# Altium PCB bob_breakout.PcbDoc
Units mil, origin at the board's own origin, x right, y up, seen from the top; angles counter-clockwise.
Board outline 5510 x 3935 mil, 2 copper layers (Top Layer, Bottom Layer); 51 components, 72 nets, 297 pads, 0 vias.
Unrouted connection lines stored in the file: 202.
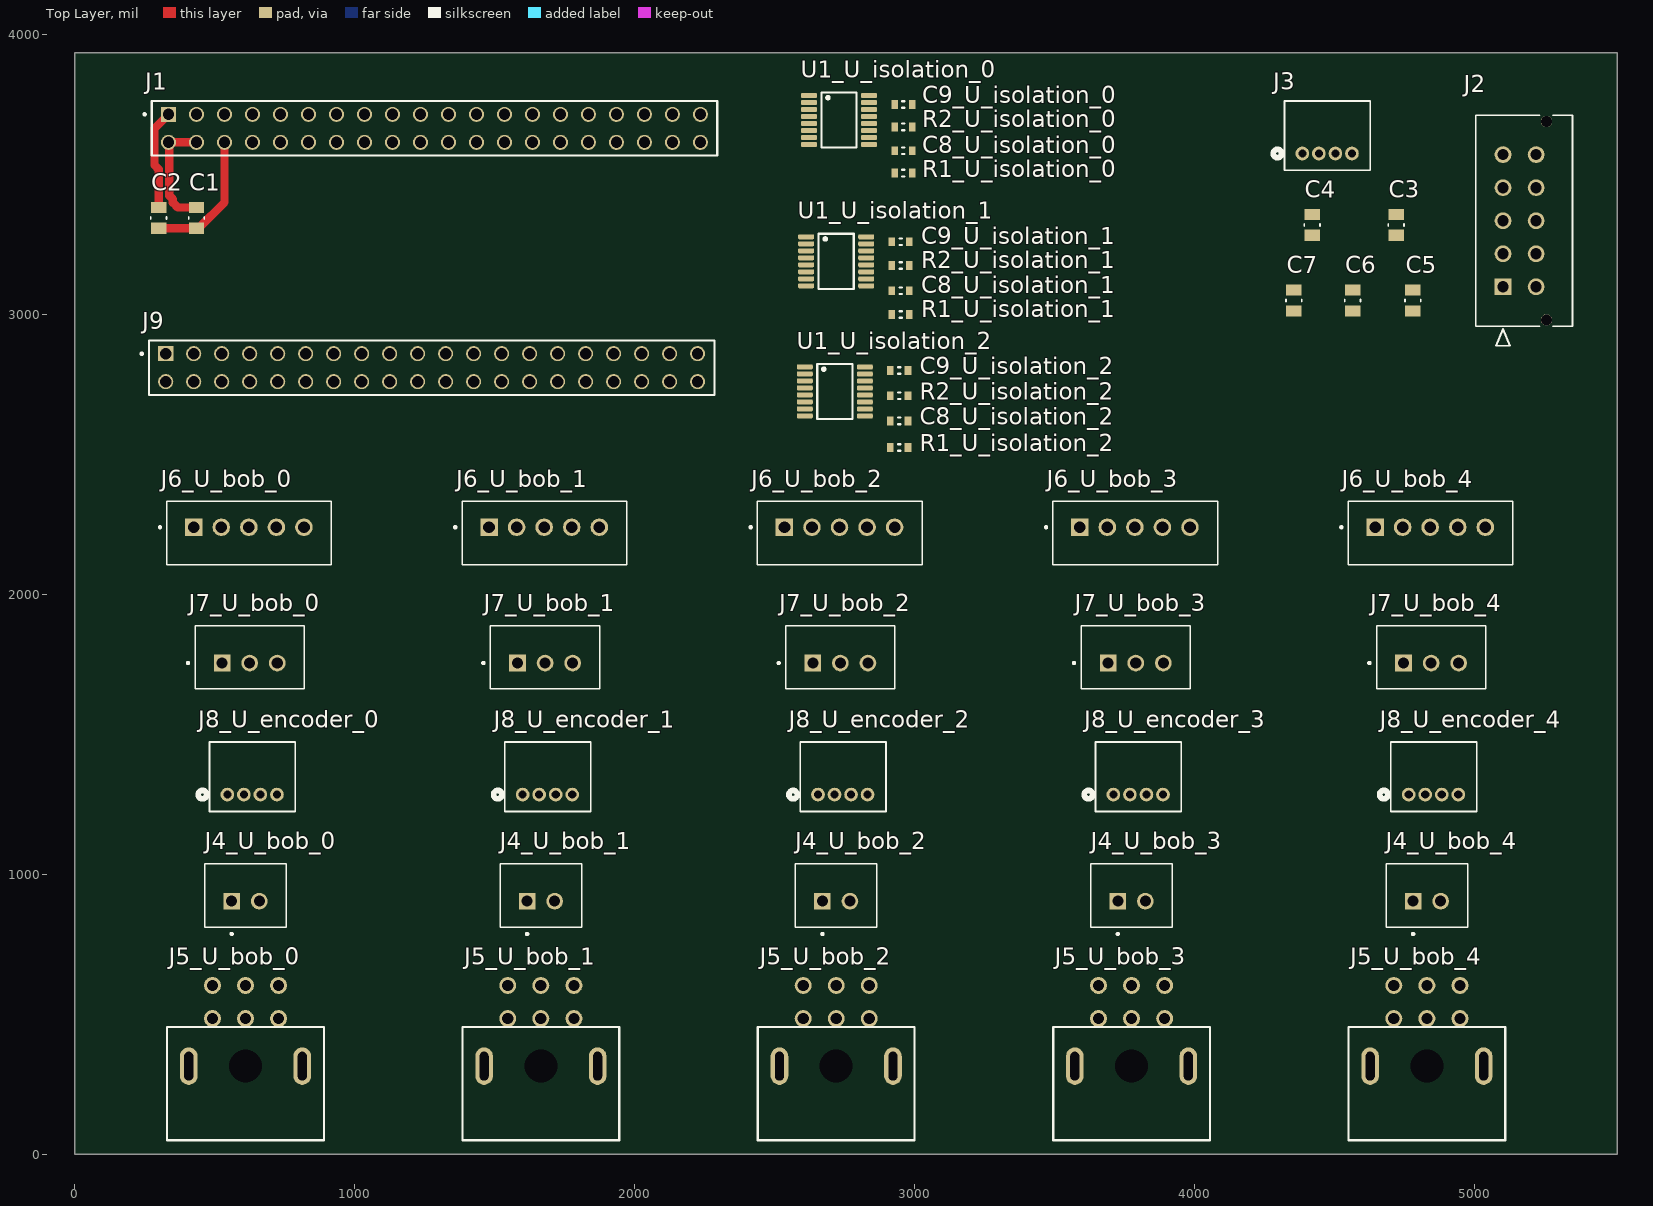
[diagram p0: Top Layer view]
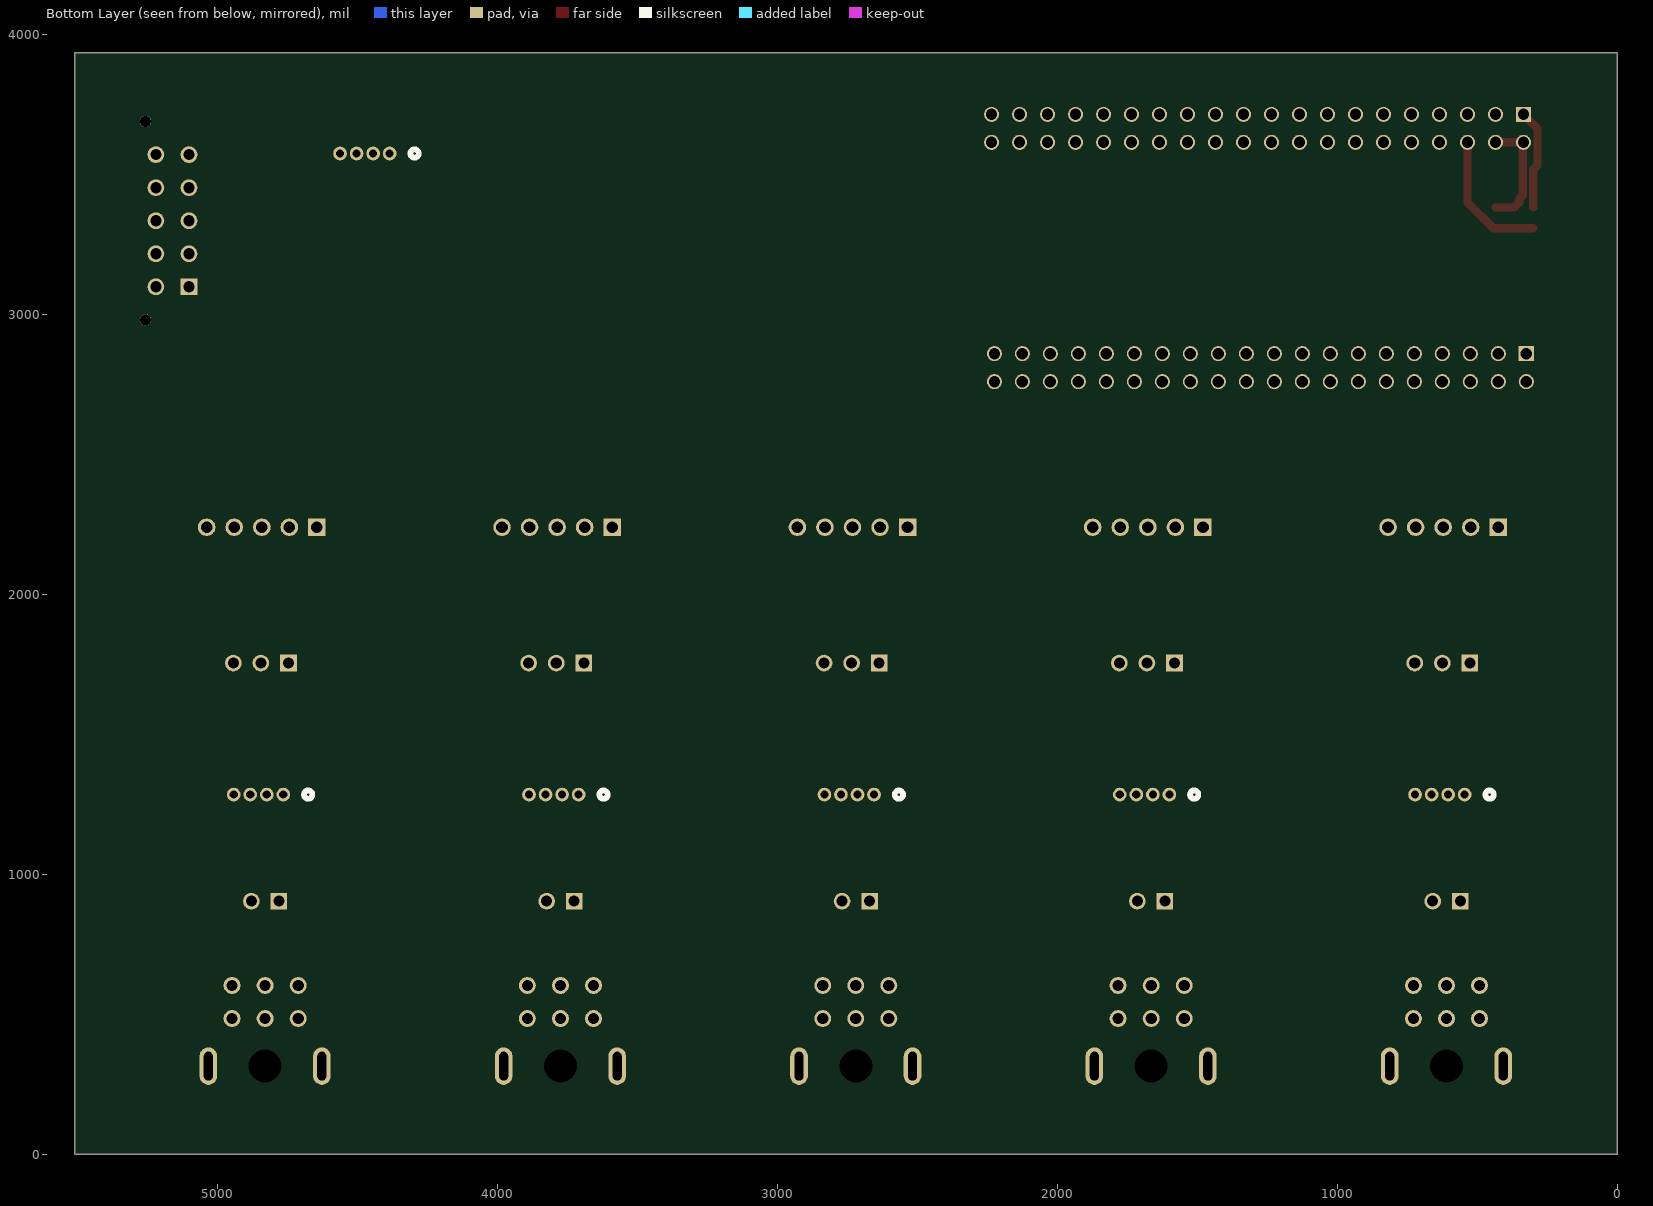
[diagram p1: Bottom Layer view, seen from below]

## Layer stack, top to bottom
Top Solder: solder mask 0.4, Solder Resist, Dk 3.5
Top Layer: signal copper 1.4
Dielectric 1: dielectric 12.6, FR-4, Dk 4.8
Bottom Layer: signal copper 1.4
Bottom Solder: solder mask 0.4, Solder Resist, Dk 3.5

## Board outline
0,0 5510,0 5510,3935 0,3935

## Design rules (kind name [scope] priority, off if disabled: settings)
BoardOutlineClearance [All] p1: gap=7.87 ignorepadtopadclearanceinfootprint=FALSE except(15.75: Arc-SplitBarrior Arc-SplitContinuation Track-SplitBarrior Track-SplitContinuation SMDPad-SplitBarrior SMDPad-SplitContinuation THPad-SplitBarrior THPad-SplitContinuation Via-SplitBarrior Via-SplitContinuation Fill-SplitBarrior Fill-SplitContinuation Poly-SplitBarrior Poly-SplitContinuation Region-SplitBarrior Region-SplitContinuation Text-SplitBarrior Text-SplitContinuation)
Clearance "Clearance Bottom Layer" [OnLayer('Bottom Layer')] p1: gap=8 ignorepadtopadclearanceinfootprint=TRUE except(10: Arc-Text Track-Text SMDPad-Text THPad-Text Via-Text Fill-Text Poly-Text Region-Text Text-Text)
Clearance "Clearance Top Layer" [OnLayer('Top Layer')] p2: gap=8 ignorepadtopadclearanceinfootprint=TRUE except(10: Arc-Text Track-Text SMDPad-Text THPad-Text Via-Text Fill-Text Poly-Text Region-Text Text-Text)
Clearance [All] p3: gap=7.87 ignorepadtopadclearanceinfootprint=TRUE except(3.5: Arc-Arc Arc-Track Arc-SMDPad Track-Track Track-SMDPad SMDPad-SMDPad; 5: Arc-Via Track-Via SMDPad-Via THPad-Via Via-Via; 10: Arc-Text Track-Text SMDPad-Text THPad-Text Via-Text Fill-Text Poly-Text Region-Text Text-Text)
HoleSize [All] p1: absolutevalues=TRUE maxlimit=248.03 minlimit=7.87 maxpercent=80.000 minpercent=20.000
MinimumAnnularRing [All] p1: minimumring=3
MinimumSolderMaskSliver [All] p1: minsoldermaskwidth=3.94
PolygonConnect PolygonConnect_1 [All] p1: thpad.connectstyle=Relief thpad.reliefconductorwidth=20 thpad.reliefentries=4 thpad.polygonreliefangle="90 Angle" thpad.airgapwidth=10 smdpad.connectstyle=Relief smdpad.reliefconductorwidth=20 smdpad.reliefentries=4 smdpad.polygonreliefangle="90 Angle" smdpad.airgapwidth=10 via.connectstyle=Direct via.reliefconductorwidth=20 via.reliefentries=4 via.polygonreliefangle="90 Angle" via.airgapwidth=10
RoomDefinition U_ui [InComponentClass('U_ui')] p1: confinementstyle=ConfineIn formatcopy=TRUE lockcomponents=FALSE outline 221.5,2691.73 221.5,2928.27 2305.87,2928.27 2305.87,2691.73
RoomDefinition U_power [InComponentClass('U_power')] p2: confinementstyle=ConfineIn formatcopy=TRUE lockcomponents=FALSE outline 4260,2875 5415,2875 5415,3785 4260,3785
RoomDefinition U_jetson-nano [InComponentClass('U_jetson-nano')] p3: confinementstyle=ConfineIn formatcopy=TRUE lockcomponents=FALSE outline 230,3210 2320,3210 2320,3785 230,3785
RoomDefinition U_isolation_2 [InComponentClass('U_isolation_2')] p4: confinementstyle=ConfineIn formatcopy=TRUE lockcomponents=FALSE outline 2555,2490 3005,2490 3005,2850 2555,2850
RoomDefinition U_isolation_1 [InComponentClass('U_isolation_1')] p5: confinementstyle=ConfineIn formatcopy=TRUE lockcomponents=FALSE outline 2560,2965 3010,2965 3010,3315 2560,3315
RoomDefinition U_isolation_0 [InComponentClass('U_isolation_0')] p6: confinementstyle=ConfineIn formatcopy=TRUE lockcomponents=FALSE outline 2570,3470 3020,3470 3020,3820 2570,3820
RoomDefinition U_encoder_4 [InComponentClass('U_encoder_4')] p7: confinementstyle=ConfineIn formatcopy=TRUE lockcomponents=FALSE outline 4641.06,1204.88 4641.06,1492.88 5028.06,1492.88 5028.06,1204.88
RoomDefinition U_encoder_3 [InComponentClass('U_encoder_3')] p8: confinementstyle=ConfineIn formatcopy=TRUE lockcomponents=FALSE outline 3586.06,1204.88 3586.06,1492.88 3973.06,1492.88 3973.06,1204.88
RoomDefinition U_encoder_2 [InComponentClass('U_encoder_2')] p9: confinementstyle=ConfineIn formatcopy=TRUE lockcomponents=FALSE outline 2531.06,1204.88 2531.06,1492.88 2918.06,1492.88 2918.06,1204.88
RoomDefinition U_encoder_1 [InComponentClass('U_encoder_1')] p10: confinementstyle=ConfineIn formatcopy=TRUE lockcomponents=FALSE outline 1476.06,1204.88 1476.06,1492.88 1863.06,1492.88 1863.06,1204.88
RoomDefinition U_encoder_0 [InComponentClass('U_encoder_0')] p11: confinementstyle=ConfineIn formatcopy=TRUE lockcomponents=FALSE outline 421.06,1204.88 421.06,1492.88 808.06,1492.88 808.06,1204.88
RoomDefinition U_bob_4 [InComponentClass('U_bob_4')] p12: confinementstyle=ConfineIn formatcopy=TRUE lockcomponents=FALSE outline 4505,35 5160,35 5160,2355 4505,2355
RoomDefinition U_bob_3 [InComponentClass('U_bob_3')] p13: confinementstyle=ConfineIn formatcopy=TRUE lockcomponents=FALSE outline 3450,35 4105,35 4105,2355 3450,2355
RoomDefinition U_bob_2 [InComponentClass('U_bob_2')] p14: confinementstyle=ConfineIn formatcopy=TRUE lockcomponents=FALSE outline 2395,35 3050,35 3050,2355 2395,2355
RoomDefinition U_bob_1 [InComponentClass('U_bob_1')] p15: confinementstyle=ConfineIn formatcopy=TRUE lockcomponents=FALSE outline 1340,35 1995,35 1995,2355 1340,2355
RoomDefinition U_bob_0 [InComponentClass('U_bob_0')] p16: confinementstyle=ConfineIn formatcopy=TRUE lockcomponents=FALSE outline 285,35 940,35 940,2355 285,2355
RoutingCorners [All] p1: cornerstyle=Round minsetback=100 maxsetback=100
RoutingVias [All] p1: holewidth=19.68 width=39.37 viastyle="Through Hole" minholewidth=7.87 minwidth=17.72 maxholewidth=39.37 maxwidth=78.74
SilkToSilkClearance [All] p1: silktosilkclearance=3.94
SilkToSolderMaskClearance [IsPad] p1: minsilkscreentomaskgap=3.94 clearancetoexposedcopper=TRUE
SolderMaskExpansion [All] p1: expansion=4 istentingtop=FALSE
Width [All] p1: maxlimit=100 minlimit=3.5 preferedwidth=15
25 further rules are at their usual default settings.

## Classes and differential pairs
component class U_isolation_2: C8_U_isolation_2 C9_U_isolation_2 R1_U_isolation_2 R2_U_isolation_2 U1_U_isolation_2
component class U_isolation_1: C8_U_isolation_1 C9_U_isolation_1 R1_U_isolation_1 R2_U_isolation_1 U1_U_isolation_1
component class U_isolation_0: C8_U_isolation_0 C9_U_isolation_0 R1_U_isolation_0 R2_U_isolation_0 U1_U_isolation_0
component class U_encoder_4: J8_U_encoder_4
component class U_bob_0: J4_U_bob_0 J5_U_bob_0 J6_U_bob_0 J7_U_bob_0
channel class isolation: U_isolation1 U_isolation2 U_isolation3
channel class encoder: U_encoder1 U_encoder_0 U_encoder_1 U_encoder_2 U_encoder_3
channel class bob: U_bob5 U_bob_1 U_bob_2 U_bob_3 U_bob_4
component class U_ui: J9
component class U_power: C3 C4 C5 C6 C7 J2 J3
component class U_jetson-nano: C1 C2 J1
component class U_encoder_0: J8_U_encoder_0
component class U_encoder_1: J8_U_encoder_1
component class U_encoder_2: J8_U_encoder_2
component class U_encoder_3: J8_U_encoder_3
component class U_bob_1: J4_U_bob_1 J5_U_bob_1 J6_U_bob_1 J7_U_bob_1
component class U_bob_2: J4_U_bob_2 J5_U_bob_2 J6_U_bob_2 J7_U_bob_2
component class U_bob_3: J4_U_bob_3 J5_U_bob_3 J6_U_bob_3 J7_U_bob_3
component class U_bob_4: J4_U_bob_4 J5_U_bob_4 J6_U_bob_4 J7_U_bob_4

## Components (designator, comment, footprint, x,y, rotation, side; value= is the part's Value field where it differs from the comment)
C1 "0.1uF 25V" 0805 435,3345 r270 top value=0.1uF
C2 "0.1uF 25V" 0805 300,3345 r270 top value=0.1uF
C3 "0.1uF 25V" 0805 4720,3320 r270 top value=0.1uF
C4 "0.1uF 25V" 0805 4420,3320 r270 top value=0.1uF
C5 "0.1uF 25V" 0805 4780,3050 r270 top value=0.1uF
C6 "0.1uF 25V" 0805 4565,3050 r270 top value=0.1uF
C7 "0.1uF 25V" 0805 4355,3050 r270 top value=0.1uF
C8_U_isolation_0 "0.10uF" 0603 2960,3585 r180 top (schematic designator C8)
C8_U_isolation_1 "0.10uF" 0603 2950,3085 r180 top (schematic designator C8)
C8_U_isolation_2 "0.10uF" 0603 2945,2620 r180 top (schematic designator C8)
C9_U_isolation_0 "0.10uF" 0603 2960,3750 r180 top (schematic designator C9)
C9_U_isolation_1 "0.10uF" 0603 2950,3260 r180 top (schematic designator C9)
C9_U_isolation_2 "0.10uF" 0603 2945,2800 r180 top (schematic designator C9)
J1 "CN HDR 40POS TH" SAMTEC_SSQ-120-22-G-D 1285,3665 r180 top
J2 "8A Molex" MOLEX_0430451012 5101.89,3098.78 r270 top
J3 "S4B-ZR(LF)(SN)" "CN S4B-ZR(LF)(SN)_JST" 4385,3575 r180 top
J4_U_bob_0 "CN HDR 2POS JST XH" JST_B2B-XH-A(LF)(SN) 610,925 r0 top (schematic designator J4)
J4_U_bob_1 "CN HDR 2POS JST XH" JST_B2B-XH-A(LF)(SN) 1665,925 r0 top (schematic designator J4)
J4_U_bob_2 "CN HDR 2POS JST XH" JST_B2B-XH-A(LF)(SN) 2720,925 r0 top (schematic designator J4)
J4_U_bob_3 "CN HDR 2POS JST XH" JST_B2B-XH-A(LF)(SN) 3775,925 r0 top (schematic designator J4)
J4_U_bob_4 "CN HDR 2POS JST XH" JST_B2B-XH-A(LF)(SN) 4830,925 r0 top (schematic designator J4)
J5_U_bob_0 "CN HDR 6POS Molex 43045-0622 (R)" 430450622 610,315 r0 top (schematic designator J5)
J5_U_bob_1 "CN HDR 6POS Molex 43045-0622 (R)" 430450622 1665,315 r0 top (schematic designator J5)
J5_U_bob_2 "CN HDR 6POS Molex 43045-0622 (R)" 430450622 2720,315 r0 top (schematic designator J5)
J5_U_bob_3 "CN HDR 6POS Molex 43045-0622 (R)" 430450622 3775,315 r0 top (schematic designator J5)
J5_U_bob_4 "CN HDR 6POS Molex 43045-0622 (R)" 430450622 4830,315 r0 top (schematic designator J5)
J6_U_bob_0 "CN HDR 5POS JST XH" JST_B5B-XH-A(LF)(SN) 425,2240 r0 top (schematic designator J6)
J6_U_bob_1 "CN HDR 5POS JST XH" JST_B5B-XH-A(LF)(SN) 1480,2240 r0 top (schematic designator J6)
J6_U_bob_2 "CN HDR 5POS JST XH" JST_B5B-XH-A(LF)(SN) 2535,2240 r0 top (schematic designator J6)
J6_U_bob_3 "CN HDR 5POS JST XH" JST_B5B-XH-A(LF)(SN) 3590,2240 r0 top (schematic designator J6)
J6_U_bob_4 "CN HDR 5POS JST XH" JST_B5B-XH-A(LF)(SN) 4645,2240 r0 top (schematic designator J6)
J7_U_bob_0 "B3B-XH-A(LF)(SN)" JST_B3B-XH-A(LF)(SN) 625,1755 r0 top (schematic designator J7)
J7_U_bob_1 "B3B-XH-A(LF)(SN)" JST_B3B-XH-A(LF)(SN) 1680,1755 r0 top (schematic designator J7)
J7_U_bob_2 "B3B-XH-A(LF)(SN)" JST_B3B-XH-A(LF)(SN) 2735,1755 r0 top (schematic designator J7)
J7_U_bob_3 "B3B-XH-A(LF)(SN)" JST_B3B-XH-A(LF)(SN) 3790,1755 r0 top (schematic designator J7)
J7_U_bob_4 "B3B-XH-A(LF)(SN)" JST_B3B-XH-A(LF)(SN) 4845,1755 r0 top (schematic designator J7)
J8_U_encoder_0 "S4B-ZR(LF)(SN)" "CN S4B-ZR(LF)(SN)_JST" 545,1285 r180 top (schematic designator J8)
J8_U_encoder_1 "S4B-ZR(LF)(SN)" "CN S4B-ZR(LF)(SN)_JST" 1600,1285 r180 top (schematic designator J8)
J8_U_encoder_2 "S4B-ZR(LF)(SN)" "CN S4B-ZR(LF)(SN)_JST" 2655,1285 r180 top (schematic designator J8)
J8_U_encoder_3 "S4B-ZR(LF)(SN)" "CN S4B-ZR(LF)(SN)_JST" 3710,1285 r180 top (schematic designator J8)
J8_U_encoder_4 "S4B-ZR(LF)(SN)" "CN S4B-ZR(LF)(SN)_JST" 4765,1285 r180 top (schematic designator J8)
J9 "CN HDR 40POS TH" SAMTEC_SSQ-120-22-G-D 1275,2810 r180 top
R1_U_isolation_0 "4.7k" 0603 2960,3505 r0 top (schematic designator R1)
R1_U_isolation_1 "4.7k" 0603 2950,3000 r180 top (schematic designator R1)
R1_U_isolation_2 "4.7k" 0603 2945,2525 r0 top (schematic designator R1)
R2_U_isolation_0 "4.7k" 0603 2960,3670 r0 top (schematic designator R2)
R2_U_isolation_1 "4.7k" 0603 2950,3175 r0 top (schematic designator R2)
R2_U_isolation_2 "4.7k" 0603 2945,2710 r180 top (schematic designator R2)
U1_U_isolation_0 "ADUM141D1BRQZ" SOP64P600X175-16N 2730,3695 r0 top (schematic designator U1)
U1_U_isolation_1 "ADUM141D1BRQZ" SOP64P600X175-16N 2720,3190 r0 top (schematic designator U1)
U1_U_isolation_2 "ADUM141D1BRQZ" SOP64P600X175-16N 2715,2725 r0 top (schematic designator U1)

## Footprints (in the part's own frame and the unit in brackets; to place one, negate y for a bottom-side part, rotate by r counter-clockwise, add the part's x,y. Pads: shape width x height; smd on the part's side, far side on the other; paste and mask are expansions set on the pad)
0603 [mm] "Chip Resistor, 2-Leads, Body 1.60x0.80mm, IPC High Density"
  rect 0.6x0.8 smd: 1(-0.8,0) 2(0.8,0)
  silkscreen extent -0.1,-0.3 0.1,0.3, body extent -0.8,-0.4 0.8,0.4, height 0.6
0805 [mil]
  rect 40x55 smd: 1(-37,0) 2(37,0)
  silkscreen extent -4,-28 4,28, body extent -47,-28 47,28, height 24
430450622 [mm] "6 POS RA MOLEX"
  round 1.53 hole 1.02: 1(3,4.32) 2(0,4.32) 3(-3,4.32) 4(3,7.32) 5(0,7.32) 6(-3,7.32)
  round 0 hole 3: MH(0,0)
  oval 1.6x3.4 hole 0.8 slot 2.6 at 90 deg: MH1(5.15,0) MH2(-5.15,0)
  silkscreen extent -7.11,-6.71 7.11,3.56, body extent -6.62,-4.65 6.58,7.59, height 3.12
"CN S4B-ZR(LF)(SN)_JST" [mil]
  round 49 hole 29 mask+0: 1(0,0) 2(-59.06,0) 3(-118.11,0) 4(-177.17,0)
  silkscreen extent -243,-188 104,60, body extent 0,0 10,10, height 10
JST_B2B-XH-A(LF)(SN) [mm]
  rect 1.508x1.508 hole 1: 1(-1.25,-0.525)
  round 1.508 hole 1: 2(1.25,-0.525)
  silkscreen extent -3.7,-3.6 3.7,2.88, body extent -3.7,-2.85 3.7,2.9, height 7.1
JST_B3B-XH-A(LF)(SN) [mm]
  rect 1.508x1.508 hole 1: 1(-2.5,0)
  round 1.508 hole 1: 2(0,0) 3(2.5,0)
  silkscreen extent -5.7,-2.35 4.95,3.4, body extent -4.96,-2.35 4.94,3.4, height 7
JST_B5B-XH-A(LF)(SN) [mm]
  rect 1.59x1.59 hole 1.06: 1(0,0)
  round 1.59 hole 1.06: 2(2.5,0) 3(5,0) 4(7.5,0) 5(10,0)
  silkscreen extent -3.16,-3.4 12.5,2.35
MOLEX_0430451012 [mm]
  rect 1.52x1.52 hole 1.02 mask+0.076: 1(0,0)
  round 1.52 hole 1.02 mask+0.076: 2(-3,0) 3(-6,0) 4(-9,0) 5(-12,0) 6(0,3) 7(-3,3) 8(-6,3) 9(-9,3) 10(-12,3)
  round 1.02 hole 1.02 unplated mask+0.076: M1(3,3.94) M2(-15,3.94)
  silkscreen extent -15.57,-2.47 5.35,6.3, body extent -15.57,-2.47 3.58,6.3, height 9.95
SAMTEC_SSQ-120-22-G-D [mm]
  rect 1.37x1.37 hole 1.02: 01(24.13,-1.27)
  round 1.37 hole 1.02: 02(24.13,1.27) 03(21.59,-1.27) 04(21.59,1.27) 05(19.05,-1.27) 06(19.05,1.27) 07(16.51,-1.27) 08(16.51,1.27) 09(13.97,-1.27) 10(13.97,1.27) 11(11.43,-1.27) 12(11.43,1.27) 13(8.89,-1.27) 14(8.89,1.27) 15(6.35,-1.27) 16(6.35,1.27) 17(3.81,-1.27) 18(3.81,1.27) 19(1.27,-1.27) 20(1.27,1.27) 21(-1.27,-1.27) 22(-1.27,1.27) 23(-3.81,-1.27) 24(-3.81,1.27) 25(-6.35,-1.27) 26(-6.35,1.27) 27(-8.89,-1.27) 28(-8.89,1.27) 29(-11.43,-1.27) 30(-11.43,1.27) 31(-13.97,-1.27) 32(-13.97,1.27) 33(-16.51,-1.27) 34(-16.51,1.27) 35(-19.05,-1.27) 36(-19.05,1.27) 37(-21.59,-1.27) 38(-21.59,1.27) 39(-24.13,-1.27) 40(-24.13,1.27)
  silkscreen extent -25.66,-2.47 26.4,2.47
SOP64P600X175-16N [mm] "SOP, 16-Leads, Body 4.90x3.91mm, Pitch 0.64mm, IPC Medium Density"
  rrect50% 1.45x0.45 smd mask+0.08: 1(-2.725,2.222) 2(-2.725,1.587) 3(-2.725,0.953) 4(-2.725,0.318) 5(-2.725,-0.318) 6(-2.725,-0.953) 7(-2.725,-1.587) 8(-2.725,-2.222) 9(2.725,-2.222) 10(2.725,-1.587) 11(2.725,-0.953) 12(2.725,-0.318) 13(2.725,0.318) 14(2.725,0.953) 15(2.725,1.587) 16(2.725,2.222)
  silkscreen extent -1.6,-2.5 1.6,2.5, body extent -2,-2.5 2,2.5, height 1.76

## Part data
C1 C2 C3 C4 C5 C6 C7: library part "CAP 0.1uF 25V", "CAP CER 0.1UF 25V X7R 0805/0603", Operating Temperature="-55°C ~ 125°C", Rating=25V, Temperature Coefficient=X7R, Tolerance=10%
C8_U_isolation_0 C8_U_isolation_1 C8_U_isolation_2 C9_U_isolation_0 C9_U_isolation_1 C9_U_isolation_2: library part "CAP 0.10uF 35V", "CAP CER 0.10UF 35V X7R 0603/0805", Operating Temperature="-55°C ~ 125°C", Package=0603/0805, Rating=35V, Temperature Coefficient=X7R, Tolerance=10%
J1 J9: "SSQ - Samtec 2.54mm Square Tail Dual Row Socket Strip 8.5mm Profile", Package=None, Availability="In Stock", Check_prices=https://www.snapeda.com/parts/SSQ-120-22-G-D/Samtec/view-part/3393219/?ref=eda, Digikey=S6104-ND, MF=Samtec, MP=SSQ-120-22-G-D, Price=None, Purchase-URL=https://pricing.snapeda.com/search/part/SSQ-120-22-G-D/?ref=eda, SnapEDA_Link=https://www.snapeda.com/parts/SSQ-120-22-G-D/Samtec/view-part/3393219/?ref=snap
J2: library part "CN HDR 10POS MOLEX 0430451012", "CONN HEADER VERT 10POS 3MM", Color=Black, Contact Resistance=10mR, Flammability Rating="UL94 V-0", Manufacturer=Molex, Manufacturer Part Number=0430451012, Max Operating Temperature=105°C, Max Voltage Rating (AC)=250V, Min Operating Temperature=-40°C, Supplier Part Number 1=WM1793-ND, Category="Headers and Wire Housings", ComponentLink1Description=http://components.arrow.com/part/dataview/0323_01052363?src-supplier=Arrow+Europe, ComponentLink1URL=http://components.arrow.com/part/dataview/0323_01052363?src-supplier=Arrow+Europe, ComponentLink2Description=http://components.arrow.com/part/dataview/2943140S3689940N3303?src-supplier=Arrow+Electronics, ComponentLink2URL=http://components.arrow.com/part/dataview/2943140S3689940N3303?src-supplier=Arrow+Electronics, Connector Type="Male Pin", Contact Material=Brass, Contact Plating=Tin, Contact Type="Male Pin", Depth=8.77mm, Fastening Type=Ramp, Housing Color=Black, Housing Material=Polymer, Length=19.15mm, Mount="Through Hole", Number of Contacts=10, Number of Ports=1, Number of Positions=10, Number of Rows=2, Number of Terminals/Pins=10, Orientation=Straight, Packaging=Tray, Pitch=0.118inch, Pricing 1="1=2.46000, 10=2.09300, 80=1.72925, 1224=1.36521, 6120=1.21049 (USD)", RoHS=Yes, RoHS Compliant=Yes, Row Spacing=0.118inch, Series="Micro-Fit 3.0™ 43045", Stock 1=22123, Supplier 1=Digi-Key, Termination=Solder
J3 J8_U_encoder_0 J8_U_encoder_1 J8_U_encoder_2 J8_U_encoder_3 J8_U_encoder_4: library part "CN HDR 4POS JST ZR", "Connector Header Through Hole, Right Angle 4 position 0.059\" (1.50mm)", Mfr_Name=JST, Supplier Part Number 1=455-1671-ND, Copyright="Copyright (C) 2021 Ultra Librarian. All rights reserved.", Digi-Key_Part_Number_1=455-1671-ND, Manufacturer_Part_Number=S4B-ZR(LF)(SN), RefDes=RefDes, Supplier 1=Digi-Key, Type=DEV
J4_U_bob_0 J4_U_bob_1 J4_U_bob_2 J4_U_bob_3 J4_U_bob_4: "Connector Header Through Hole 2 position 0.098 _2.50mm_ / JST XH", Package=None, Availability=Unavailable, MF="JST Sales", MP=B2B-XH-A_LF__SN_, Price=None, SnapEDA_Link=https://www.snapeda.com/parts/B2B-XH-A%28LF%29%28SN%29/JST%20Sales%20America%20Inc./view-part/492310/?ref=snap
J5_U_bob_0 J5_U_bob_1 J5_U_bob_2 J5_U_bob_3 J5_U_bob_4: "Molex 43045-0622 6POS Microfit / dual row, right angle"
J6_U_bob_0 J6_U_bob_1 J6_U_bob_2 J6_U_bob_3 J6_U_bob_4: "Connector Header Through Hole 5 position 0.098\" (2.50mm)", Package=None, Availability=Unavailable, ComponentLink1Description=Digikey, ComponentLink1URL=https://www.digikey.ca/en/products/detail/jst-sales-america-inc/B5B-XH-A-LF-SN/1530483, Digikey=455-2270-ND, MF="JST Sales", MP=B5B-XH-A(LF)(SN), Price=None
J7_U_bob_0 J7_U_bob_1 J7_U_bob_2 J7_U_bob_3 J7_U_bob_4: library part "CN 3POS TH JSTXH", "CN 3POS TH JST XH", Package=None, Availability=Warning, DigiKey-Purchase-URL=https://snapeda.com/shop?store=DigiKey&id=231271, MF="JST Sales", MP=B3B-XH-A(LF)(SN), Price=None, SnapEDA_Link=https://www.snapeda.com/parts/B3B-XH-A(LF)(SN)/JST%20Sales%20America%20Inc./view-part/231271/?ref=snap
R1_U_isolation_0 R1_U_isolation_1 R1_U_isolation_2 R2_U_isolation_0 R2_U_isolation_1 R2_U_isolation_2: library part "RES 4.7k 1/8W - 5%", "RES SMD 4.7k OHM 5% 1/8W 0805", Package=0805, Power (Watts)=0.125W, Tolerance=5%
U1_U_isolation_0 U1_U_isolation_1 U1_U_isolation_2: library part "ISO ADUM141D1BRQZ", "DGTL ISO 3.75KV 4CH SPI 16SSOP 3/1"

## Nets (pads, with @x,y where several pads share a name; then routed paths per layer and width w, separated by ;. In a path a pad name is that pad's centre, name@x,y a point inside that pad or via, vN(x,y) a via of type N, cw(c..) or ccw(c..) an arc to the next point about the centre after c; other vN are vias at no path point)
3V3: C3.1 C9_U_isolation_0.2 C9_U_isolation_1.2 C9_U_isolation_2.2 J2.5 J7_U_bob_0.2 J7_U_bob_1.2 J7_U_bob_2.2 J7_U_bob_3.2 J7_U_bob_4.2 U1_U_isolation_0.16 U1_U_isolation_1.16 U1_U_isolation_2.16
5V: J2.4 J7_U_bob_0.1 J7_U_bob_1.1 J7_U_bob_2.1 J7_U_bob_3.1 J7_U_bob_4.1 J8_U_encoder_0.1 J8_U_encoder_1.1 J8_U_encoder_2.1 J8_U_encoder_3.1 J8_U_encoder_4.1
12V: C5.1 C6.1 C7.1 J2.1 J2.2 J2.3 J5_U_bob_0.1 J5_U_bob_0.2 J5_U_bob_0.3 J5_U_bob_1.1 J5_U_bob_1.2 J5_U_bob_1.3 J5_U_bob_2.1 J5_U_bob_2.2 J5_U_bob_2.3 J5_U_bob_3.1 J5_U_bob_3.2 J5_U_bob_3.3 J5_U_bob_4.1 J5_U_bob_4.2 J5_U_bob_4.3
AUDIO_MCLK: J1.07 J9.07
CAM_AF_EN: J1.29 J9.29
GND: C3.2 C4.2 C9_U_isolation_0.1 C9_U_isolation_1.1 C9_U_isolation_2.1 J2.9 J2.10 J7_U_bob_0.3 J7_U_bob_1.3 J7_U_bob_2.3 J7_U_bob_3.3 J7_U_bob_4.3 J8_U_encoder_0.4 J8_U_encoder_1.4 J8_U_encoder_2.4 J8_U_encoder_3.4 J8_U_encoder_4.4 R2_U_isolation_0.2 R2_U_isolation_1.2 R2_U_isolation_2.2 U1_U_isolation_0.9 U1_U_isolation_0.15 U1_U_isolation_1.9 U1_U_isolation_1.15 U1_U_isolation_2.9 U1_U_isolation_2.15
GPIO_PE6: J1.33 J9.33
GPIO_PZ0: J1.31 J9.31
I2C_1_SCL: J1.28 J9.28
I2C_1_SDA: J1.27 J9.27
I2C_2_SCL: J1.05 J9.05
I2C_2_SDA: J1.03 J9.03
I2S_4_LRCK: J1.35 J9.35
I2S_4_SCLK: J1.12 J9.12
I2S_4_SDIN: J1.38 J9.38
I2S_4_SDOUT: J1.40 J9.40
JETSON_3V3: C2.1 C8_U_isolation_0.2 C8_U_isolation_1.2 C8_U_isolation_2.2 J1.01 J1.17 J9.01 J9.17 U1_U_isolation_0.1 U1_U_isolation_1.1 U1_U_isolation_2.1 | length 359.9
  Top Layer w30: C2.1 300,3518.53 285.03,3533.5 285.03,3665.03 J1.01
JETSON_5V: C1.1 J1.02 J1.04 J9.02 J9.04 | length 413.6
  Top Layer w30: C1.1 368.07,3382 350.5,3399.57 350.5,3411.53 338,3424.03 338,3612 J1.02 J1.04
JETSON_GND: C1.2 C2.2 C8_U_isolation_0.1 C8_U_isolation_1.1 C8_U_isolation_2.1 J1.06 J1.09 J1.14 J1.20 J1.25 J1.30 J1.34 J1.39 J3.4 J9.06 J9.09 J9.14 J9.20 J9.25 J9.30 J9.34 J9.39 R1_U_isolation_0.2 R1_U_isolation_1.2 R1_U_isolation_2.2 U1_U_isolation_0.2 U1_U_isolation_0.8 U1_U_isolation_1.2 U1_U_isolation_1.8 U1_U_isolation_2.2 U1_U_isolation_2.8 | length 487.8
  Top Layer w30: C2.2 C1.2 442.5,3308 535,3400.5 J1.06
JETSON_VDD: J3.1
LCD_BL_PWM: J1.32 J9.32
LCD_TE: J1.15 J9.15
NetJ4_U_bob_0_1: J4_U_bob_0.1 J8_U_encoder_0.2
NetJ4_U_bob_0_2: J4_U_bob_0.2 J8_U_encoder_0.3
NetJ4_U_bob_1_1: J4_U_bob_1.1 J8_U_encoder_1.2
NetJ4_U_bob_1_2: J4_U_bob_1.2 J8_U_encoder_1.3
NetJ4_U_bob_2_1: J4_U_bob_2.1 J8_U_encoder_2.2
NetJ4_U_bob_2_2: J4_U_bob_2.2 J8_U_encoder_2.3
NetJ4_U_bob_3_1: J4_U_bob_3.1 J8_U_encoder_3.2
NetJ4_U_bob_3_2: J4_U_bob_3.2 J8_U_encoder_3.3
NetJ4_U_bob_4_1: J4_U_bob_4.1 J8_U_encoder_4.2
NetJ4_U_bob_4_2: J4_U_bob_4.2 J8_U_encoder_4.3
NetR1_U_isolation_0_1: R1_U_isolation_0.1 U1_U_isolation_0.7
NetR1_U_isolation_1_1: R1_U_isolation_1.1 U1_U_isolation_1.7
NetR1_U_isolation_2_1: R1_U_isolation_2.1 U1_U_isolation_2.7
NetR2_U_isolation_0_1: R2_U_isolation_0.1 U1_U_isolation_0.10
NetR2_U_isolation_1_1: R2_U_isolation_1.1 U1_U_isolation_1.10
NetR2_U_isolation_2_1: R2_U_isolation_2.1 U1_U_isolation_2.10
NetU1_U_isolation_2_4: U1_U_isolation_2.4
NetU1_U_isolation_2_5: U1_U_isolation_2.5
NetU1_U_isolation_2_6: U1_U_isolation_2.6
NetU1_U_isolation_2_11: U1_U_isolation_2.11
NetU1_U_isolation_2_12: U1_U_isolation_2.12
NetU1_U_isolation_2_13: U1_U_isolation_2.13
PGND: C5.2 C6.2 C7.2 J2.6 J2.7 J2.8 J5_U_bob_0.4 J5_U_bob_0.5 J5_U_bob_0.6 J5_U_bob_1.4 J5_U_bob_1.5 J5_U_bob_1.6 J5_U_bob_2.4 J5_U_bob_2.5 J5_U_bob_2.6 J5_U_bob_3.4 J5_U_bob_3.5 J5_U_bob_3.6 J5_U_bob_4.4 J5_U_bob_4.5 J5_U_bob_4.6
SPI_1_CS0: J1.24 J9.24 U1_U_isolation_1.3
SPI_1_CS0_ISO: J6_U_bob_0.1 U1_U_isolation_1.14
SPI_1_CS1: J1.26 J9.26 U1_U_isolation_1.4
SPI_1_CS1_ISO: J6_U_bob_1.1 U1_U_isolation_1.6
SPI_1_CS2: U1_U_isolation_1.5
SPI_1_CS2_ISO: J6_U_bob_2.1 U1_U_isolation_1.12
SPI_1_CS3: U1_U_isolation_1.11
SPI_1_CS3_ISO: J6_U_bob_3.1 U1_U_isolation_1.13
SPI_1_CS4: U1_U_isolation_2.3
SPI_1_CS4_ISO: J6_U_bob_4.1 U1_U_isolation_2.14
SPI_1_CS5: U1_U_isolation_0.3
SPI_1_CS5_ISO: J6_U_bob_0.2 J6_U_bob_1.2 J6_U_bob_2.2 J6_U_bob_3.2 J6_U_bob_4.2 U1_U_isolation_0.14
SPI_1_MISO: J1.21 J9.21 U1_U_isolation_0.11
SPI_1_MISO_ISO: J6_U_bob_0.5 J6_U_bob_1.5 J6_U_bob_2.5 J6_U_bob_3.5 J6_U_bob_4.5 U1_U_isolation_0.13
SPI_1_MOSI: J1.19 J9.19 U1_U_isolation_0.5
SPI_1_MOSI_ISO: J6_U_bob_0.4 J6_U_bob_1.4 J6_U_bob_2.4 J6_U_bob_3.4 J6_U_bob_4.4 U1_U_isolation_0.12
SPI_1_SCK: J1.23 J9.23 U1_U_isolation_0.4
SPI_1_SCK_ISO: J6_U_bob_0.3 J6_U_bob_1.3 J6_U_bob_2.3 J6_U_bob_3.3 J6_U_bob_4.3 U1_U_isolation_0.6
SPI_2_CS0: J1.18 J9.18
SPI_2_CS1: J1.16 J9.16
SPI_2_MISO: J1.22 J9.22
SPI_2_MOSI: J1.37 J9.37
SPI_2_SCK: J1.13 J9.13
UART_2_CTS: J1.36 J9.36
UART_2_RTS: J1.11 J9.11
UART_2_RX: J1.10 J3.3 J9.10
UART_2_TX: J1.08 J3.2 J9.08
pads on no net: C4.1 J2.M1 J2.M2 J5_U_bob_0.MH J5_U_bob_0.MH1 J5_U_bob_0.MH2 J5_U_bob_1.MH J5_U_bob_1.MH1 J5_U_bob_1.MH2 J5_U_bob_2.MH J5_U_bob_2.MH1 J5_U_bob_2.MH2 J5_U_bob_3.MH J5_U_bob_3.MH1 J5_U_bob_3.MH2 J5_U_bob_4.MH J5_U_bob_4.MH1 J5_U_bob_4.MH2

## Silkscreen, mask and mechanical layers (free items; w line width, h text height)
Mechanical 1:
  the board outline again, w10